# Allegro board demob2.brd
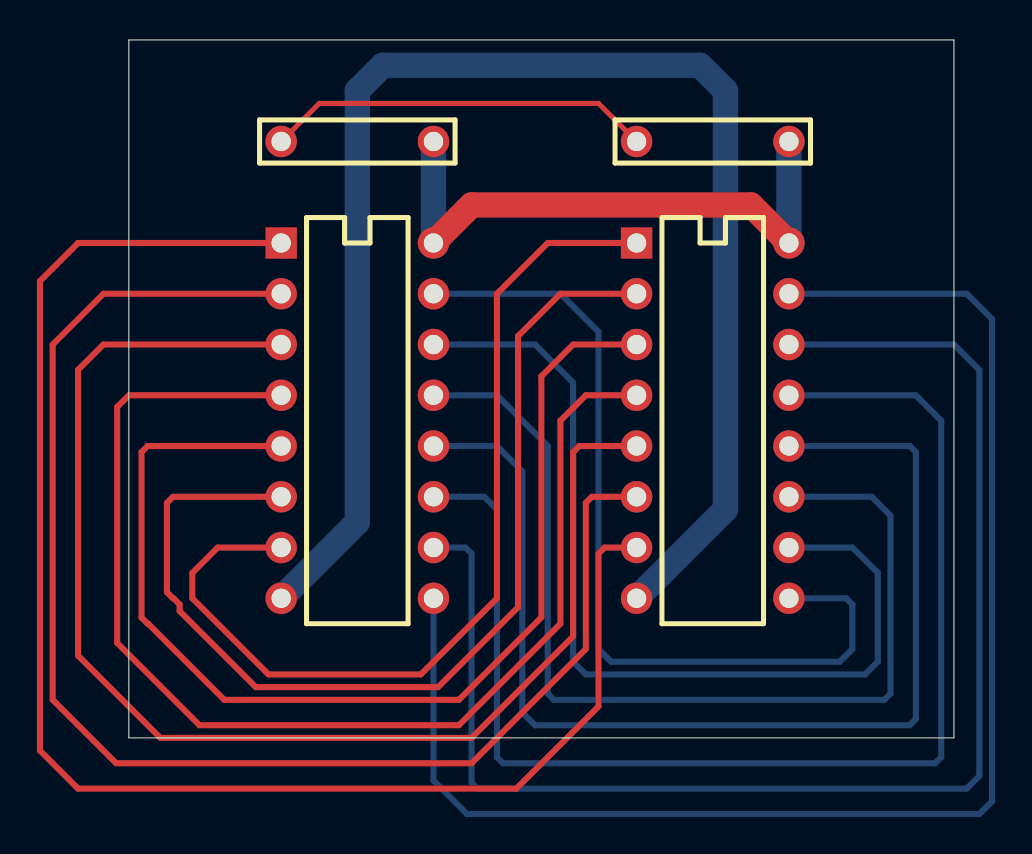
[diagram p0: board, top side]
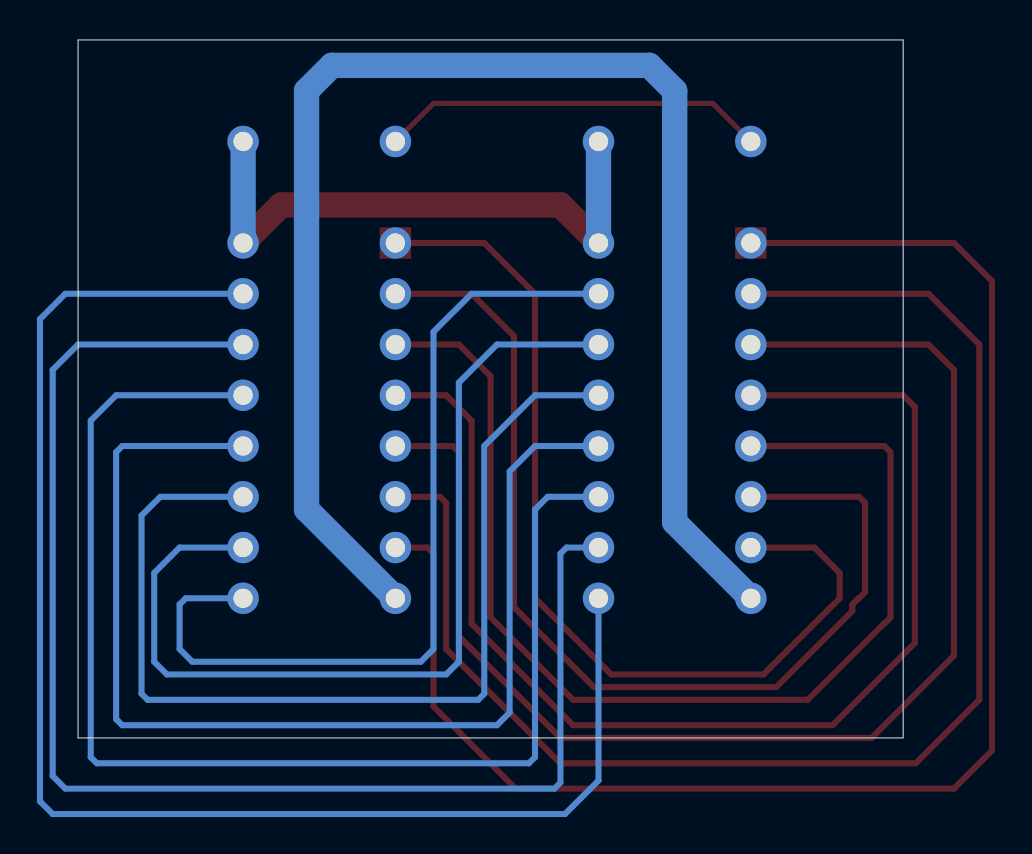
[diagram p1: board, bottom side, seen from below]

Outline 41.27 x 34.93 mm; copper layers: TOP, GND, POWER, INNER1, INNER2, BOTTOM. Coordinates in mm from the lower left corner of the outline.
Outline path: 0,34.93 41.27,34.93 41.27,0 0,0 0,34.93

## Design rules (mm)
nets with their own width: min track width 0.254; nets GND_SIGNAL
nets with their own width: min track width 0.305; nets N01899 N01900 N01901 N01902 N01903 N01904 N01905 N01906 N01907 N01908 N01909 N01910 N01911 N01912
nets with their own width: min track width 1.27; nets GND VCC

## Placement (name value [footprint] x y rotation side)
C1  CAP NP  [AC300100A]  15.24 29.85 180 top
C2  CAP NP  [AC300100A]  33.02 29.85 180 top
U1  74LS158  [DIP16]  7.62 24.77 270 top
U2  74LS158  [DIP16]  25.4 24.77 270 top

## Library data of the parts
C1 C2 = CAP_NP
U1 U2 = 74LS158

## Footprints (pads in the part's own frame, mm; a bottom-side part is the same pattern mirrored in y, then rotated)
AC300100A
  round 1.575 hole 0.965: 1(0,0) 2(7.62,0)
DIP16
  rect 1.575x1.575 hole 0.965: 1(0,0)
  round 1.575 hole 0.965: 2(2.54,0) 3(5.08,0) 4(7.62,0) 5(10.16,0) 6(12.7,0) 7(15.24,0) 8(17.78,0) 9(17.78,7.62) 10(15.24,7.62) 11(12.7,7.62) 12(10.16,7.62) 13(7.62,7.62) 14(5.08,7.62) 15(2.54,7.62) 16(0,7.62)

## Nets
GND: U1.8(TP-8) U2.8(TP-8)
GND_SIGNAL: C1.2(TP-2) C2.2(TP-2)
VCC: C1.1(TP-1) C2.1(TP-1) U1.16(TP-16) U2.16(TP-16)
N01899: U1.2(TP-2) U2.6(TP-6)
N01900: U1.3(TP-3) U2.5(TP-5)
N01901: U1.4(TP-4) U2.4(TP-4)
N01902: U1.5(TP-5) U2.3(TP-3)
N01903: U1.6(TP-6) U2.2(TP-2)
N01904: U1.7(TP-7) U2.1(TP-1)
N01905: U1.9(TP-9) U2.15(TP-15)
N01906: U1.10(TP-10) U2.14(TP-14)
N01907: U1.11(TP-11) U2.13(TP-13)
N01908: U1.12(TP-12) U2.12(TP-12)
N01909: U1.14(TP-14) U2.10(TP-10)
N01910: U1.1(TP-1) U2.7(TP-7)
N01911: U1.13(TP-13) U2.11(TP-11)
N01912: U1.15(TP-15) U2.9(TP-9)

## Routing (per net, layer and track width the routed paths; a pad name or vN(x,y) marks a point on that pad's centre or on a via; arc(x,y) is an arc through that point)
GND: length 73.7
  BOTTOM w1.27: U1.8 11.43,10.8 11.43,32.39 12.7,33.66 28.57,33.66 29.84,32.39 29.84,11.43 U2.8
GND_SIGNAL: length 19.4
  TOP w0.254: C2.2 23.5,31.75 9.53,31.75 C1.2
VCC: length 29.5
  TOP w1.27: U1.16 17.14,26.67 31.11,26.67 U2.16
  BOTTOM w1.27: C1.1 U1.16 ; C2.1 U2.16
N01899: length 70.6
  TOP w0.305: U2.6 23.16,12.07 22.86,11.76 22.86,4.45 17.14,-1.27 -0.64,-1.27 -3.81,1.91 -3.81,19.68 -1.27,22.22 U1.2
N01900: length 66.1
  TOP w0.305: U1.3 -1.27,19.68 -2.54,18.41 -2.54,4.11 1.57,0 17.14,0 22.23,5.08 22.23,14.3 22.53,14.61 U2.5
N01901: length 60.7
  TOP w0.305: U2.4 22.86,17.14 21.59,15.88 21.59,5.72 16.51,0.64 3.53,0.64 -0.58,4.75 -0.58,16.56 0,17.14 U1.4
N01902: length 56.3
  TOP w0.305: U2.3 22.23,19.68 20.64,18.1 20.64,6.03 16.51,1.91 4.78,1.91 0.97,5.72 0.94,5.72 0.64,6.02 0.64,14.3 0.94,14.61 U1.5
N01903: length 52.1
  TOP w0.305: U2.2 21.59,22.22 19.47,20.1 19.47,6.54 15.47,2.54 6.35,2.54 2.54,6.35 2.54,6.68 2.24,6.99 2.21,6.99 1.91,7.29 1.91,11.76 2.21,12.07 U1.6
N01904: length 47.9
  TOP w0.305: U2.1 20.95,24.77 18.41,22.22 18.41,6.99 14.61,3.17 6.99,3.17 3.17,6.99 3.17,8.25 4.45,9.52 U1.7
N01905: length 72.8
  BOTTOM w0.305: U2.15 41.91,22.22 43.18,20.95 43.18,-3.17 42.55,-3.81 16.92,-3.81 15.24,-2.13 U1.9
N01906: length 69.6
  BOTTOM w0.305: U2.14 41.27,19.68 42.55,18.41 42.55,-1.9 41.91,-2.54 17.45,-2.54 17.14,-2.24 17.14,9.22 16.84,9.52 U1.10
N01907: length 63.3
  BOTTOM w0.305: U2.13 39.37,17.14 40.64,15.88 40.64,-0.97 40.34,-1.27 18.72,-1.27 18.41,-0.97 18.41,11.43 17.78,12.07 U1.11
N01908: length 56.9
  BOTTOM w0.305: U1.12 18.41,14.61 19.68,13.34 19.68,1.27 20.32,0.64 39.07,0.64 39.37,0.94 39.37,14.3 39.07,14.61 U2.12
N01909: length 46.9
  BOTTOM w0.305: U1.14 20.32,19.68 22.23,17.78 22.23,3.81 22.86,3.17 36.83,3.17 37.47,3.81 37.47,8.25 36.2,9.52 U2.10
N01910: length 76.5
  TOP w0.305: U2.7 23.8,9.52 23.5,9.22 23.5,1.57 19.38,-2.54 -2.54,-2.54 -4.45,-0.63 -4.45,22.86 -2.54,24.77 U1.1
N01911: length 50.9
  BOTTOM w0.305: U1.13 18.41,17.14 20.95,14.61 20.95,2.21 21.26,1.91 37.8,1.91 38.1,2.21 38.1,11.13 37.16,12.07 U2.11
N01912: length 43.7
  BOTTOM w0.305: U1.15 21.59,22.22 23.5,20.32 23.5,4.45 24.13,3.81 35.56,3.81 36.2,4.45 36.2,6.68 35.89,6.99 U2.9
